# EAGLE board ConcentradorC (EAGLE 7.6.0)
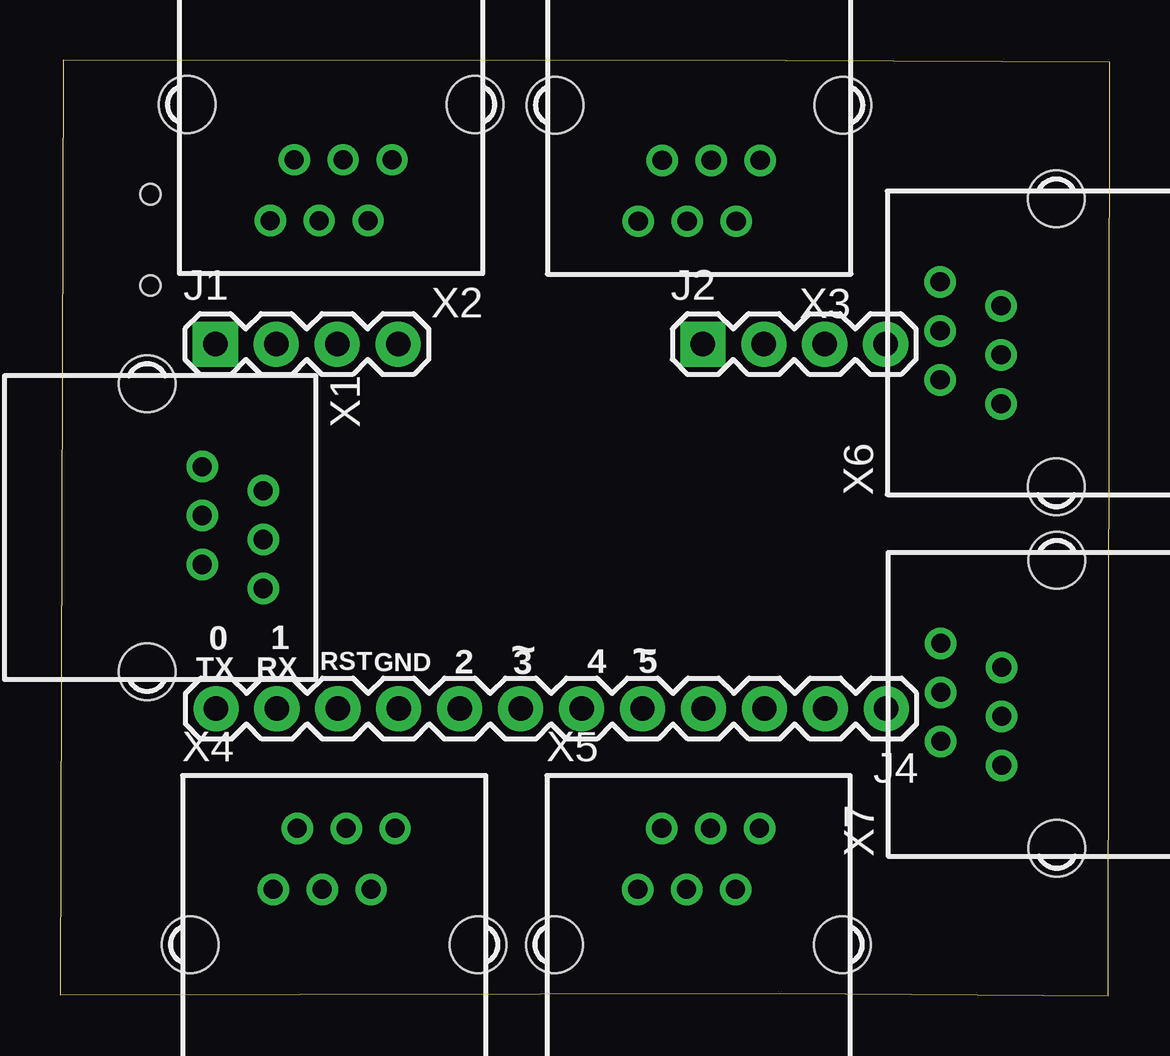
[diagram p0: board, top side]
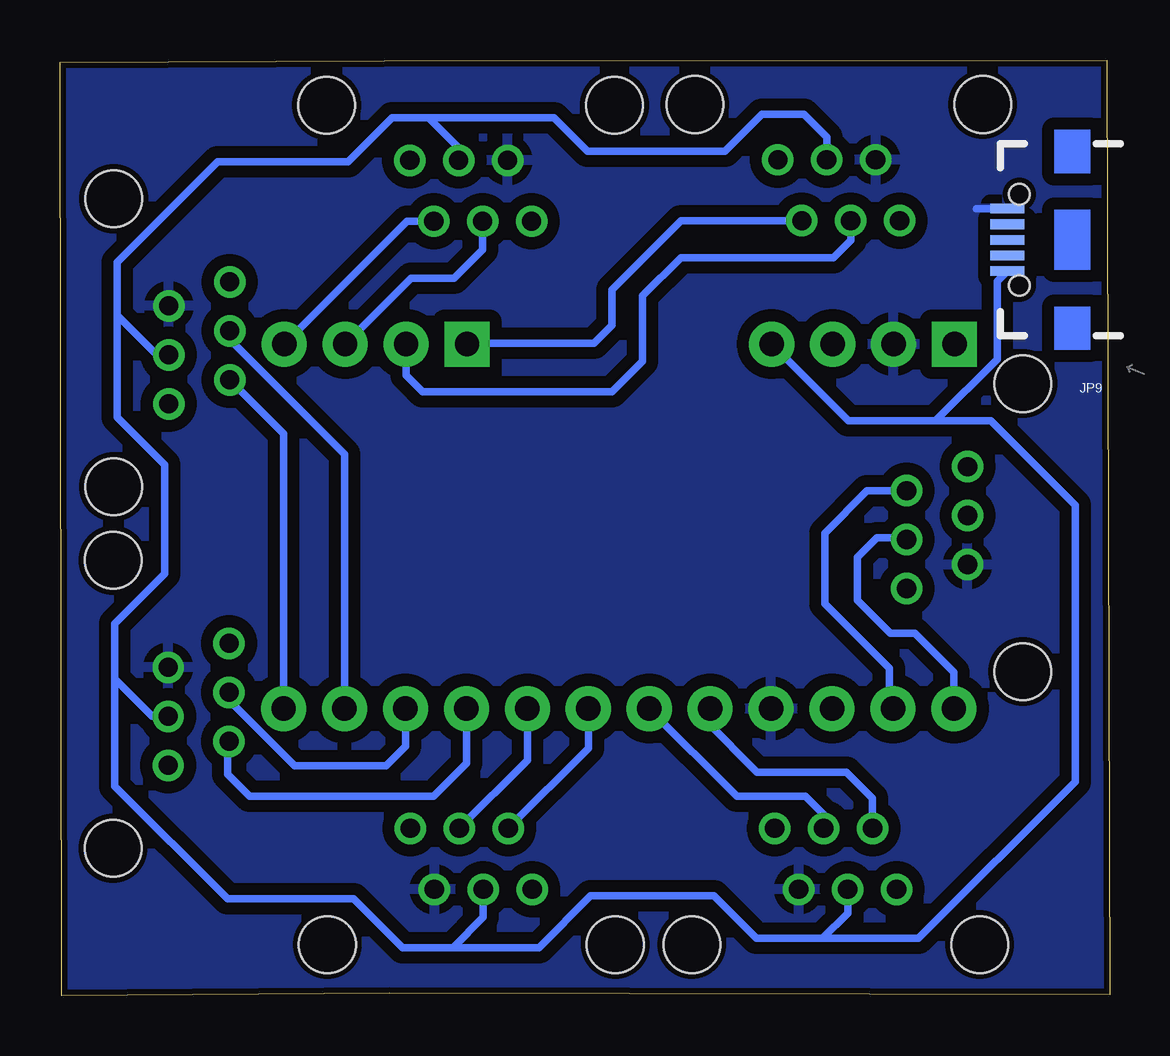
[diagram p1: board, bottom side, seen from below]

Size 43.76 x 38.99 mm. Coordinates in mm from the lower left corner, seen from the top.
Outline: 0,0.05 30.02,0.1 43.69,0 43.76,38.89 30.25,38.96 0.13,38.99 0,0.05
Copper layers (1*16): Top 0.035mm / dielectric 1.5mm / Bottom 0.035mm
Design rules "ITEADstudio_DRC *": minimum track width 6mil, minimum drill 12mil, track to track 20mil, track to pad 16mil, pad to pad 6mil, via to via 6mil, smd to smd 0mil, copper to edge 10mil, drill to drill 10mil, minimum pad ring 10mil, minimum via ring 6mil, stop-mask expansion 2mil, vias tented up to drill 100mil, thermal gap 15mil
Net classes: 1 power: width 0.381 mm, clearance 0.254 mm

## Footprints (pad centres in the part's own frame; a part is rotated, then mirrored left to right if it is on the bottom)
1X04 = drill 1.016 pad 1.88 square: 1 0,0 | drill 1.016 pad 1.88: 2 2.54,0; 3 5.08,0; 4 7.62,0
1X12 = drill 1.016 pad 1.88: 1 0,0; 2 2.54,0; 3 5.08,0; 4 7.62,0; 5 10.16,0; 6 12.7,0; 7 15.24,0; 8 17.78,0; 9 20.32,0; 10 22.86,0; 11 25.4,0; 12 27.94,0
USB-AB-MICRO-SMD_V03 = smd 1.4 x 0.4: D+1 2.7,0; D-1 2.7,0.65; GND1 2.7,-1.3; ID1 2.7,-0.65; VBUS1 2.7,1.3 | hole 0.85: 2.2,1.9; 2.2,-1.9
YH-55-10 = drill 0.8 pad 1.3: 1 -2.54,2.3; 2 -1.54,4.84; 3 -0.5,2.3; 4 0.5,4.84; 5 1.54,2.3; 6 2.54,4.84 | hole 2.36: -6,0; 6,0

## Placement (x,y rotation side)
J1  [1X04]  6.48,27.15 0 top
J2  [1X04]  26.8,27.15 0 top
J4  [1X12]  34.44,11.96 180 top
JP9  Micro USB  [USB-AB-MICRO-SMD_V03]  1.57,31.5 180 bottom
X1  YH-55-10  [YH-55-10]  3.63,19.51 270 top
X2  YH-55-10  [YH-55-10]  11.3,37.13 180 top
X3  YH-55-10  [YH-55-10]  26.64,37.11 180 top
X4  YH-55-10  [YH-55-10]  11.43,2.13 0 top
X5  YH-55-10  [YH-55-10]  26.62,2.13 0 top
X6  YH-55-10  [YH-55-10]  41.53,27.2 90 top
X7  YH-55-10  [YH-55-10]  41.55,12.14 90 top

## Library data of the parts
J1 J2 = SparkFun-Connectors; PROD_ID: CONN-09696
J4 = SparkFun-Connectors
JP9 = SparkFun-Connectors; PROD_ID: CONN-11794
X1-X7 = con-wenzhou-yihua; OC_FARNELL: unknown; OC_NEWARK: unknown

## Nets
GND [power]: J1.2 J4.9 JP9.GND1 X1.5 X2.5 X3.5 X4.5 X5.5 X6.5 X7.5
N$1: J4.5 X5.4
N$2: J4.6 X5.2
N$3: J4.3 X7.4
N$4: J4.12 X1.4
N$5: J4.11 X1.2
N$6: J4.10
N$7: J4.4 X7.2
N$8: J4.7 X4.4
N$9: J4.8 X4.2
N$10: J4.2 X6.4
N$11: J4.1 X6.2
N$12: J2.4 X3.2
N$13: J2.3 X3.4
N$14: J2.2 X2.4
N$15: J2.1 X2.2
VIN: J1.4 JP9.VBUS1 X2.3 X3.3 X4.3 X5.3 X6.3 X7.3

## Tracks (layer width: path | path; a pad name or v marks a point on that pad's centre or on a via)
AGND
  pour Bottom: 0.23,38.94 43.66,38.86 43.79,0 -0.03,0.03 0.08,29.13
GND
  Bottom 0.305: JP9.GND1 5.56,32.8 5.56,32.79
  pour Bottom: 0.13,38.89 43.66,38.86 43.79,0.03 -0.08,0.08
N$1
  Bottom 0.305: J4.5 24.28,9.81 X5.4
N$2
  Bottom 0.305: J4.6 21.74,10.31 X5.2
N$3
  Bottom 0.305: J4.3 29.36,10.39 30.18,9.58 33.99,9.58 36.55,12.14 36.55,12.48 X7.4
N$4
  Bottom 0.305: J4.12 6.5,13.49 8.13,15.11 9.14,15.11 10.52,16.48 10.52,18.26 9.7,19.08 8.54,19.08 X1.4
N$5
  Bottom 0.305: X1.2 10.12,21.05 11.89,19.28 11.89,16.33 9.19,13.64 9.19,12.12 J4.11
N$7
  Bottom 0.305: J4.4 26.82,9.68 28.19,8.31 35.86,8.31 36.78,9.22 36.78,10.54 X7.2
N$8
  Bottom 0.305: X4.4 11.93,7.54 12.7,8.31 15.54,8.31 J4.7
N$9
  Bottom 0.305: X4.2 9.89,8.24 10.97,9.32 14.71,9.32 16.81,11.43 16.81,11.81 J4.8
N$10
  Bottom 0.305: J4.2 31.9,22.55 36.55,27.2 36.55,27.56 X6.4
N$11
  Bottom 0.305: J4.1 34.44,23.42 X6.2
N$12
  Bottom 0.305: X3.2 29.3,32.27 J2.4
N$13
  Bottom 0.305: X3.4 26.14,31.08 27.33,29.9 29.13,29.9 J2.3
N$14
  Bottom 0.305: X2.4 10.8,31.49 11.53,30.76 17.88,30.76 19.48,29.16 19.48,26.44 20.75,25.17 28.65,25.17 29.34,25.86 J2.2
N$15
  Bottom 0.305: X2.2 17.87,32.29 20.75,29.41 20.75,27.94 21.51,27.18 26.77,27.18 J2.1
VIN
  Bottom 0.305: X2.3 11.8,35.78 12.75,36.73 14.5,36.73 16.05,35.18 21.77,35.18 23.16,36.58 28.4,36.58 | 28.4,36.58 29.92,36.58 31.75,34.75 37.19,34.75 41.38,30.56 41.38,28.35 | 41.38,28.35 41.38,24.1 39.4,22.12 39.4,17.58 41.48,15.49 41.48,13.21 | 41.48,13.21 41.48,8.74 36.78,4.04 31.52,4.04 29.49,2.01 27.38,2.01 | 27.38,2.01 23.8,2.01 21.64,4.17 16.51,4.17 14.73,2.39 11.99,2.39 | 11.99,2.39 7.98,2.39 1.45,8.92 1.45,20.45 4.95,23.95 7.26,23.95 | 7.26,23.95 10.9,23.95 J1.4 | X4.3 10.93,3.45 11.99,2.39 | X5.3 26.12,3.27 27.38,2.01 | X7.3 39.91,11.64 41.48,13.21 | X6.3 39.73,26.7 41.38,28.35 | X3.3 27.14,35.32 28.4,36.58 | JP9.VBUS1 4.7,29.77 4.7,26.52 7.26,23.95

## Text on the board
_tsilk: 0 | 1 | TX | RX | RST | 2 | ~ | 3 | 4 | ~ | 5 | GND